# Altium PCB SL1 Xilinx Spartan-Component Clearance.PcbDoc
Units mm, origin at the board's own origin, x right, y up, seen from the top; angles counter-clockwise.
Board outline 180.01 x 50.51 mm, 2 copper layers (Top Layer, Bottom Layer), stack 1.646 mm thick; 115 components, 126 nets, 641 pads, 0 vias.
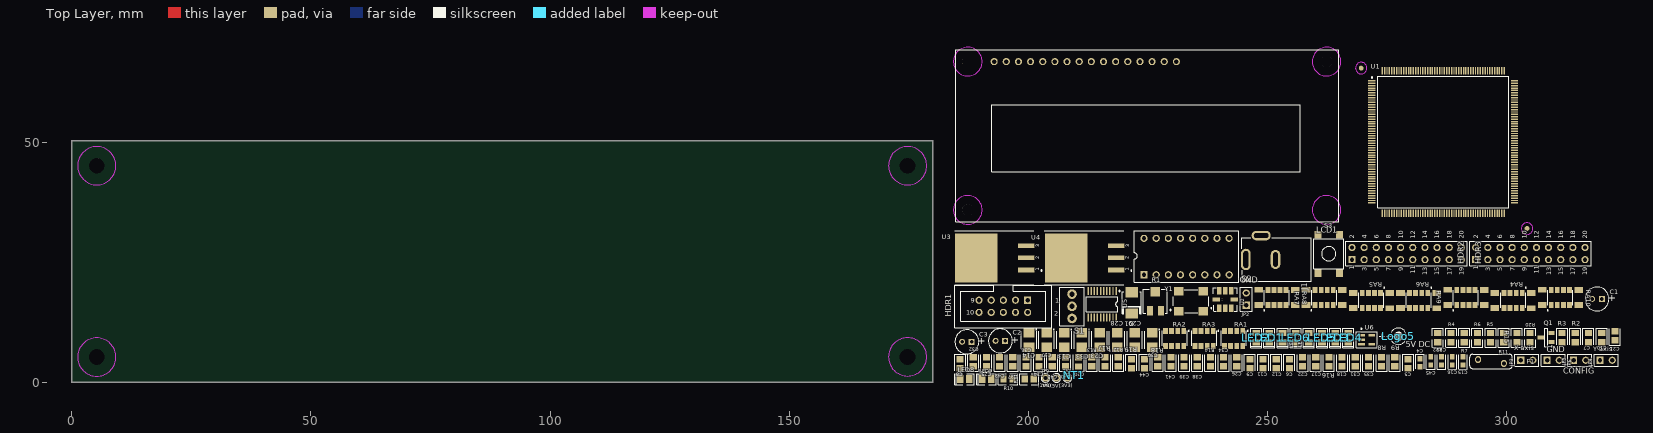
[diagram p0: Top Layer view]
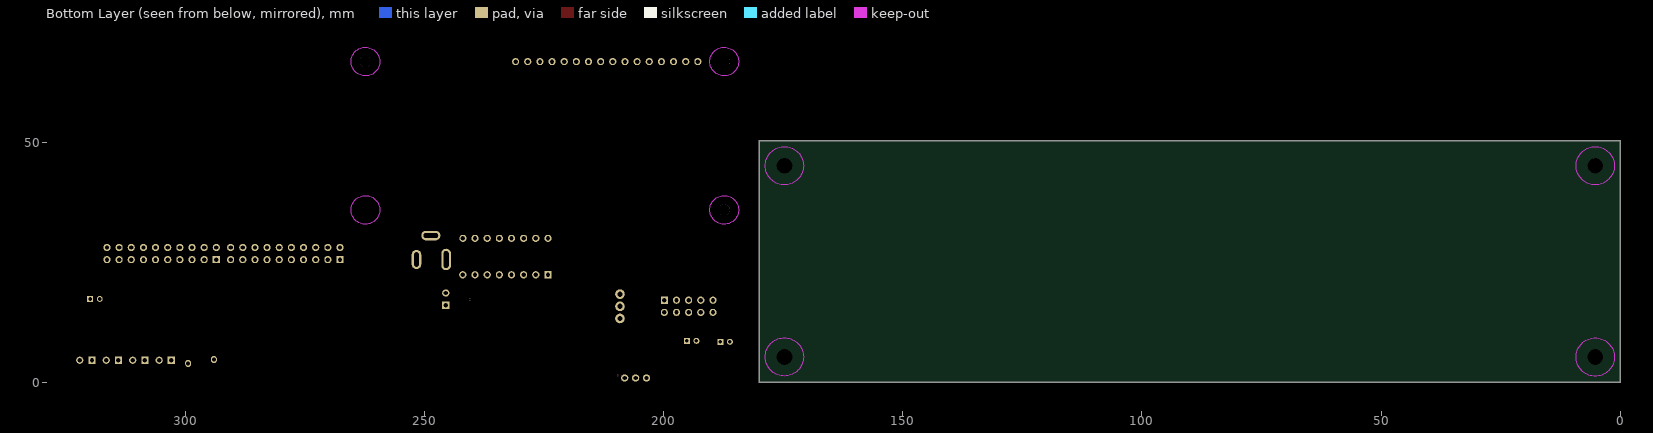
[diagram p1: Bottom Layer view, seen from below]

## Layer stack, top to bottom
Top Solder: solder mask 0.0102, Solder Resist, Dk 3.5
Top Layer: signal copper 0.0356
Dielectric1: core 1.5748, FR-4, Dk 4.8
Bottom Layer: signal copper 0.0356
Bottom Solder: solder mask 0.0102, Solder Resist, Dk 3.5

## Board outline
0,-0.005 cw(c0,0) -0.005,0 -0.005,50.5 cw(c0,50.5) 0,50.505 180,50.505 cw(c180,50.5) 180.005,50.5 180.005,0 cw(c180,0) 180,-0.005

## Design rules (kind name [scope] priority, off if disabled: settings)
Clearance "Clearance_Power Polygon" [inpolygon and innetclass('Power')] p1: gap=0.3 ignorepadtopadclearanceinfootprint=FALSE except(0: Arc-Hole Track-Hole SMDPad-Hole THPad-Hole Via-Hole Fill-Hole Poly-Hole Region-Hole Text-Hole)
Clearance [All] p2: gap=0.2 ignorepadtopadclearanceinfootprint=FALSE except(0: Arc-Hole Track-Hole SMDPad-Hole THPad-Hole Via-Hole Fill-Hole Poly-Hole Region-Hole Text-Hole) // General
ComponentClearance ComponentClearance_LCD1_U1 [Incomponent('LCD1') vs Incomponent('U1')] p1: gap=0.254 collisioncheckmode=3 verticalgap=0.254 showdistances=FALSE
ComponentClearance ComponentClearance_All [All] p2: gap=0.254 collisioncheckmode=3 verticalgap=0.254 showdistances=FALSE
FabricationTestPointUsage TestPointUsage [All] p1 off: valid=0 allowmultiple=FALSE
FabricationTestpoint Testpoint [All] p1 off: side=3 testpointundercomponent=TRUE minsize=1.016 maxsize=2.54 preferedsize=1.524 minholesize=0 maxholesize=1.016 preferedholesize=0.813 testpointgrid=0.025 allowsidetop=TRUE allowsidebottom=TRUE usegrid=TRUE gridtolerance=0
HoleSize [All] p1: absolutevalues=TRUE maxlimit=3.302 minlimit=0 maxpercent=80.000 minpercent=20.000
PlaneConnect [All] p1: planeconnectstyle=Relief reliefexpansion=0.3 reliefentries=4 reliefconductorwidth=0.2 reliefairgap=0.2
PolygonConnect PolygonConnect_Power [innetclass('Power')] p1: connectstyle=Relief reliefconductorwidth=0.3 reliefentries=4 polygonreliefangle="90 Angle" airgapwidth=0.254
PolygonConnect [All] p2: connectstyle=Relief reliefconductorwidth=0.2 reliefentries=4 polygonreliefangle="90 Angle" airgapwidth=0.254
RoutingVias RoutingVias_Power [innetclass('Power')] p1: holewidth=0.6 width=0.9 viastyle="Through Hole" minholewidth=0.6 minwidth=0.9 maxholewidth=0.8 maxwidth=1.5
RoutingVias [All] p2: holewidth=0.6 width=0.9 viastyle="Through Hole" minholewidth=0.6 minwidth=0.9 maxholewidth=0.6 maxwidth=0.9
SilkToSolderMaskClearance SilkscreenOverComponentPads [IsPad] p1: minsilkscreentomaskgap=0.254 clearancetoexposedcopper=TRUE
SolderMaskExpansion SolderMaskExpansion_Power_Vias [isvia] p1: expansion=0 istentingtop=FALSE
SolderMaskExpansion [All] p2: expansion=0.1 istentingtop=FALSE
Width Width_Power [innetclass('Power') and not inpolygon] p1: maxlimit=2 minlimit=0.3 preferedwidth=0.3
Width [All] p2: maxlimit=2 minlimit=0.2 preferedwidth=0.2
24 further rules are at their usual default settings.

## Classes and differential pairs
net class Power: 5V GND VCCINT VCCO
net class LCD_DB[7..0]: LCD_DB0 LCD_DB1 LCD_DB2 LCD_DB3 LCD_DB4 LCD_DB5 LCD_DB6 LCD_DB7
net class LEDS[7..0]: LEDS0 LEDS1 LEDS2 LEDS3 LEDS4 LEDS5 LEDS6 LEDS7
net class SW[7..0]: SW0 SW1 SW2 SW3 SW4 SW5 SW6 SW7
component class SL_FPGA_Manual_2E: C1 C2 C3 C5 C6 C7 C8 C9 C10 C11 C12 C13 C14 C17 C18 C20 C21 C22 C23 C24 C25 C26 C27 C28 C29 C30 C31 C32 C33 C34 C35 C36 C37 C38 C39 C40 C41 C42 C43 D1 F1 J1 JP2 JP6 LED9 R12 R13 R14 R15 R17 R18 R19 S1 TP1 TP2 TP3 U3 U4
component class U_SL_Config: C4 C44 LED8 R4 R5 R6 R20 U5 U6
component class U_SL_FPGA_Auto_2E: U1
component class U_SL_LCD_SW_LED: LCD1 LED0 LED1 LED2 LED3 LED4 LED5 LED6 LED7 Q1 R1 R2 R3 R8 R9 R16 RA1 RA2 RA3 RA4 RA5 RA6 RA7 RA8 RA9 RA10 S2 S3

## Components (designator, comment, footprint, x,y, rotation, side; value= is the part's Value field where it differs from the comment)
C1 "100uF 16V" CAPPR2-5X6.8 318.876,17.379 r180 top
C2 "100uF 16V" CAPPR2-5X6.8 194.14,8.623 r180 top
C3 "100uF 16V" CAPPR2-5X6.8 187.14,8.423 r180 top
C4 "10nF" CC1608-0603 281.856,4.057 r270 top
C5 "0.1uF" CC2012-0805 279.36,3.856 r270 top
C6 "0.1uF" CC2012-0805 254.574,3.856 r270 top
C7 "0.1uF" CC2012-0805 317.091,9.31 r270 top
C8 "0.1uF" CC2012-0805 185.724,3.856 r270 top
C9 "0.1uF" CC2012-0805 246.312,3.856 r270 top
C10 "0.1uF" CC2012-0805 319.845,9.31 r270 top
C11 "0.1uF" CC2012-0805 249.066,3.856 r270 top
C12 "0.1uF" CC2012-0805 251.82,3.856 r270 top
C13 "10uF" MCCT-B 207.485,8.8 r270 top
C14 "10uF" MCCT-B 200.127,8.8 r270 top
C15 "100nF" CC1608-0603 290.875,4.444 r90 top
C16 "100nF" CC1608-0603 288.621,4.444 r90 top
C17 "0.1uF" CC2012-0805 260.068,4.245 r90 top
C18 "0.1uF" CC2012-0805 265.576,4.245 r90 top
C19 "100nF" CC1608-0603 286.367,4.444 r90 top
C20 "0.1uF" CC2012-0805 210.496,4.245 r90 top
C21 "0.1uF" CC2012-0805 322.585,9.699 r90 top
C22 "0.1uF" CC2012-0805 257.314,4.245 r90 top
C23 "10uF" MCCT-B 214.865,8.809 r90 top
C24 "0.1uF" CC2012-0805 202.234,4.245 r90 top
C25 "0.1uF" CC2012-0805 191.218,4.245 r90 top
C26 "0.1uF" CC2012-0805 243.544,4.245 r90 top
C27 "10uF" MCCT-B 203.806,8.8 r270 top
C28 "10uF" MCCT-B 218.544,8.809 r90 top
C29 "10uF" MCCT-B 222.223,8.809 r90 top
C30 "10uF" MCCT-B 225.88,8.8 r270 top
C31 "0.1uF" CC2012-0805 268.33,4.245 r90 top
C32 "0.1uF" CC2012-0805 188.464,4.245 r90 top
C33 "10uF" MCCT-B 211.164,8.8 r270 top
C34 "0.1uF" CC2012-0805 240.79,4.245 r90 top
C35 "0.1uF" CC2012-0805 271.084,4.245 r90 top
C36 "0.1uF" CC2012-0805 199.48,4.245 r90 top
C37 "0.1uF" CC2012-0805 196.726,4.245 r90 top
C38 "0.1uF" CC2012-0805 235.282,4.245 r90 top
C39 "0.1uF" CC2012-0805 232.528,4.245 r90 top
C40 "0.1uF" CC2012-0805 207.742,4.245 r90 top
C41 "0.1uF" CC2012-0805 229.774,4.245 r90 top
C42 "0.1uF" CC2012-0805 204.988,4.245 r90 top
C43 "0.1uF" CC2012-0805 193.972,4.245 r90 top
C44 "0.1uF" CC2012-0805 224.28,3.856 r270 top
C45 "10nF" CC1608-0603 284.113,4.444 r90 top
D1 "SM6T6V8A" DO214 221.605,16.599 r270 top
F1 "Polyswitch, 1.1A" RUE160_0.2 296.704,4.323 r0 top
HDR1 "Header 5X2" HDR2X5_LP 199.84,17.123 r0 top
HDR2 "Header 10X2" HDR2X10 293.513,25.601 r0 top
HDR3 "Header 10X2" HDR2X10 267.659,25.601 r0 top
J1 "KLD-0202-B" KLD-0202 259.151,25.641 r180 top
JP2 "GND" HDR1X2 245.535,16.09 r90 top
JP3 "X axis" HDR1X2 302.917,4.573 r0 top
JP4 "Y axis" HDR1X2 319.519,4.573 r0 top
JP5 "CONFIG" HDR1X2 313.985,4.573 r0 top
JP6 "GND" HDR1X2 308.451,4.573 r0 top
LCD1 "162A" 162A 192.837,67.005 r0 top
LED0 "HSMH-C170" "SMD _LED" 253.128,9.307 r90 top
LED1 "HSMH-C170" "SMD _LED" 250.374,9.307 r90 top
LED2 "HSMH-C170" "SMD _LED" 247.62,9.307 r90 top
LED3 "HSMH-C170" "SMD _LED" 264.144,9.307 r90 top
LED4 "HSMH-C170" "SMD _LED" 266.898,9.307 r90 top
LED5 "HSMH-C170" "SMD _LED" 261.39,9.307 r90 top
LED6 "HSMH-C170" "SMD _LED" 255.882,9.307 r90 top
LED7 "HSMH-C170" "SMD _LED" 258.636,9.307 r90 top
LED8 "HSMH-C170" "SMD _LED" 186.7,0.641 r0 top
LED9 "HSMH-C170" "SMD _LED" 191.284,0.641 r0 top
Logo5 "5V" "5V SYMBOL" 277.357,9.598 r0 top
NT1 "GND" NT 209.599,1.706 r270 top net-tie
Q1 "2N7002" SO-G3 308.215,9.343 r90 top
R1 "20K" POT4MM-2 226.547,16.897 r90 top
R2 "560R" CC2012-0805 314.337,9.31 r270 top
R3 "10K" CC2012-0805 311.583,9.31 r270 top
R4 "4K7" CR2012-0805 288.344,9.309 r270 top
R5 "4K7" CR2012-0805 296.606,9.309 r270 top
R6 "4K7" CR2012-0805 293.852,9.309 r270 top
R7 "1K" CR2012-0805 291.098,9.309 r270 top
R8 "68R" CC2012-0805 273.838,4.245 r90 top
R9 "68R" CC2012-0805 276.592,4.245 r90 top
R10 "680R" CR2012-0805 195.74,0.647 r180 top
R11 "0R" CR2012-0805 299.36,9.3 r90 top
R12 "100R" CC2012-0805 218.758,4.245 r90 top
R13 "120R" CC2012-0805 213.25,4.245 r90 top
R14 "100R" CC2012-0805 238.036,4.245 r90 top
R15 "270R" CR2012-0805 302.114,9.3 r90 top
R16 "4K7" CC2012-0805 262.822,4.245 r90 top
R17 "47R" CC2012-0805 216.004,4.245 r90 top
R18 "120R" CC2012-0805 227.02,4.245 r90 top
R19 "5R6" CC2012-0805 221.526,3.856 r270 top
R20 "270R" CR2012-0805 304.868,9.3 r90 top
R21 "100R" CR2012-0805 200.185,0.646 r0 top
R22 "100R" CR2012-0805 285.59,9.3 r90 top
RA1 "270R" MNR34 242.919,9.127 r270 top
RA2 "270R" MNR34 230.581,9.127 r270 top
RA3 "270R" MNR34 236.75,9.127 r270 top
RA4 "4K7" MNR34T 301.341,17.067 r90 top
RA5 "4K7" MNR34T 271.719,17.067 r90 top
RA6 "4K7" MNR34T 281.593,17.067 r90 top
RA7 "4K7" MNR34T 261.827,17.688 r270 top
RA8 "4K7" MNR34T 251.953,17.688 r270 top
RA9 "270R" MNR34T 291.449,17.688 r270 top
RA10 "270R" MNR34T 311.197,17.688 r270 top
S1 "TL36WW050" PCB_SWITCH 209.123,13.297 r90 top
S2 "A6ER-8104" DIP-16-KEY 224.187,22.441 r0 top
S3 "DTSM-61-NR" B3FS_SWITCH 262.768,26.831 r270 top
TP1 "(5V)" TP 205.846,0.868 r0 top
TP2 "(3V3)" TP 208.135,0.868 r0 top
TP3 "(1V8)" TP 203.557,0.868 r0 top
U1 "XC2S300E-6PQ208C" PQ208 286.719,50.238 r0 top
U2 "ADXL202E" E-8 241.141,17.277 r90 top
U3 "LM1084IS-ADJ" TO-263 199.576,23.448 r90 top
U4 "LM1084IS-ADJ" TO-263 218.355,23.448 r90 top
U5 "XCF02SVO20C" VO20 215.408,16.286 r180 top
U6 "SN74LVC1G04DBV" SO-G5/P.95 270.691,8.85 r270 top
Y1 "25MHz" QSMO_4200 231.474,14.398 r0 top

## Footprints (in the part's own frame and the unit in brackets; to place one, negate y for a bottom-side part, rotate by r counter-clockwise, add the part's x,y. Pads: shape width x height; smd on the part's side, far side on the other; paste and mask are expansions set on the pad)
"5V SYMBOL" [mm]
  silkscreen extent -4.01,-1.71 1.7,1.71
162A [mm]
  round 1.5 hole 0.9: 1(0,0) 2(2.54,0) 3(5.08,0) 4(7.62,0) 5(10.16,0) 6(12.7,0) 7(15.24,0) 8(17.78,0) 9(20.32,0) 10(22.86,0) 11(25.4,0) 12(27.94,0) 13(30.48,0) 14(33.02,0) 15(35.56,0) 16(38.1,0)
  round 2.3 hole 2.5 unplated: M1(-5.5,0) M2(69.5,0) M3(-5.5,-31) M4(69.5,-31)
  Keep-Out Layer circle w0.2: c-5.5,0 r3
  Keep-Out Layer circle w0.2: c-5.5,-31 r3
  Keep-Out Layer circle w0.2: c69.5,-31 r3
  Keep-Out Layer circle w0.2: c69.5,0 r3
  silkscreen extent -8,-33.5 72,2.5, body extent -8.01,-33.5 72,2.5, height 10.16
B3FS_SWITCH [mm]
  rect 1.6x1.4 smd: 1(3.998,-2.244) 2(-4.012,-2.244) 3(3.998,2.246) 4(-4.012,2.246)
  silkscreen extent -3.17,-3.15 3.14,3.16, body extent -4.57,-3.15 4.57,3.16, height 4.57
CAPPR2-5X6.8 [mm]
  rect 1.25x1.25 hole 0.75: 1(-0.994,-0.009)
  round 1.25 hole 0.75: 2(1.006,-0.009)
  silkscreen extent -2.49,-2.51 2.5,2.49, body extent -2.49,-2.51 2.51,2.49, height 10.16
CC1608-0603 [mm]
  rect 1.1x1 smd: 1(-0.843,0.001) 2(0.857,0.001)
  silkscreen extent -1.79,-0.9 1.31,0.9, body extent -1.46,-0.57 1.46,0.57, height 0.76
CC2012-0805 [mm]
  rect 1.3x1.5 smd: 1(-0.945,-0.007) 2(0.955,-0.007)
  silkscreen extent -1.99,-1.16 1.51,1.14, body extent -1.52,-0.7 1.52,0.7, height 0.76
CR2012-0805 [mm]
  rect 1.3x1.5 smd: 1(-0.946,0) 2(0.954,0)
  silkscreen extent -2,-1.15 2,1.15, body extent -1.52,-0.7 1.52,0.7, height 0.76
DIP-16-KEY [mm]
  rect 1.5x1.5 hole 0.9: 1(-0.011,0.001)
  round 1.5 hole 0.9: 2(2.529,0.001) 3(5.069,0.001) 4(7.609,0.001) 5(10.149,0.001) 6(12.689,0.001) 7(15.229,0.001) 8(17.789,0.001) 9(17.769,7.621) 10(15.229,7.621) 11(12.689,7.621) 12(10.149,7.621) 13(7.609,7.621) 14(5.069,7.621) 15(2.529,7.621) 16(-0.011,7.621)
  silkscreen extent -2.06,-1.59 19.82,9.2, body extent -2.03,-1.52 19.81,9.14, height 7.11
DO214 [mm]
  rect 2.159x2.7 smd: 1(-2.21,0.005) 2(2.235,0.005)
  silkscreen extent -2.27,-1.96 2.3,1.97, body extent -3.18,-1.27 3.18,1.27, height 1.27
E-8 [mil]
  round 15 hole 20 unplated: 0(-0.02,23.98)
  rect 60x35 smd: 1(-72.85,49.98) 2(-72.85,-0.02) 3(-72.85,-50.02) 5(72.82,-50.02) 6(72.82,-0.02) 7(72.82,49.98)
  rect 35x60 smd: 4(-0.02,-74.82) 8(-0.02,74.79)
  silkscreen extent -98,-98 99,118, body extent -95,-95 95,95, height 80
HDR1X2 [mm]
  rect 1.5x1.5 hole 0.9: 1(-0.011,0.007)
  round 1.5 hole 0.9: 2(2.529,0.007)
  silkscreen extent -1.28,-1.26 3.8,1.28, body extent -1.27,-1.27 3.81,1.27, height 10
HDR2X5_LP [mm]
  rect 1.5x1.5 hole 0.9: 1(0.003,0.004)
  round 1.5 hole 0.9: 2(0.003,-2.536) 3(-2.537,0.004) 4(-2.537,-2.536) 5(-5.077,0.004) 6(-5.077,-2.536) 7(-7.617,0.004) 8(-7.617,-2.536) 9(-10.157,0.004) 10(-10.157,-2.536)
  silkscreen extent -15.24,-5.71 5.08,3.18, body extent -15.24,-5.71 5.08,3.18, height 10
HDR2X10 [mm]
  rect 1.5x1.5 hole 0.9: 1(-0.011,0.007)
  round 1.5 hole 0.9: 2(-0.011,2.547) 3(2.529,0.007) 4(2.529,2.547) 5(5.069,0.007) 6(5.069,2.547) 7(7.609,0.007) 8(7.609,2.547) 9(10.149,0.007) 10(10.149,2.547) 11(12.689,0.007) 12(12.689,2.547) 13(15.229,0.007) 14(15.229,2.547) 15(17.769,0.007) 16(17.769,2.547) 17(20.309,0.007) 18(20.309,2.547) 19(22.849,0.007) 20(22.849,2.547)
  silkscreen extent -1.28,-1.26 24.12,3.82, body extent -1.27,-1.27 24.13,3.81, height 10
KLD-0202 [mm]
  oval 2x4.5 hole 1 slot 3.5 at 90 deg: 1(13.692,-0.001)
  oval 2x4 hole 1 slot 3 at 90 deg: 2(7.492,-0.001)
  oval 4x2 hole 1 slot 3 at 0 deg: 3(10.492,-5.001)
  silkscreen extent -0.01,-4.5 14.59,4.5, body extent 0,-4.44 14.6,4.45, height 7.62
MCCT-B [mm]
  rect 2x2.2 smd: 1(-1.505,-0.002) 2(1.495,-0.002)
  silkscreen extent -2.3,-1.6 1.8,1.6, body extent -2.29,-0.89 2.29,0.89, height 1.27
MNR34 [mm]
  rect 1.2x1 smd: 1(-1.578,1.898) 2(-1.578,0.628) 3(-1.578,-0.642) 4(-1.578,-1.912) 5(1.572,-1.912) 6(1.572,-0.642) 7(1.572,0.628) 8(1.572,1.898)
  silkscreen extent -1.68,-2.62 1.55,3.06, body extent -2.03,-2.29 2.03,2.29, height 1.27
MNR34T [mm]
  rect 1.2x1 smd: 1(1.575,-1.896) 2(1.575,-0.626) 3(1.575,0.644) 4(1.575,1.914) 5(-1.575,1.914) 6(-1.575,0.644) 7(-1.575,-0.626) 8(-1.575,-1.896)
  rect 1.2x1.8 smd: STP(-1.6,-3.801) STP(-1.575,3.819) STP(1.575,3.819) STP(1.575,-3.801)
  silkscreen extent -1.55,-2.76 2.79,2.62, body extent -1.65,-2.71 1.68,2.72, height 2
NT [mm]
  rect 0.2x0.2 smd: 1(0.01,0.011) 2(0.51,0.011)
  Top Layer lines w0.3: 0.51,0.011 0.01,0.011
PCB_SWITCH [mm]
  round 2 hole 1.1: 1(0.011,0.005) 2(2.551,0.005) 3(5.091,0.005)
  silkscreen extent -1.54,-2.53 6.59,2.55, body extent -1.52,-2.54 6.6,2.54, height 15
POT4MM-2 [mm]
  rect 2x1.3 smd: CCW(-2.008,-1.162) CW(-2.008,1.138)
  rect 2x2 smd: W(1.992,-0.012)
  silkscreen extent -2.51,-2.51 2.49,2.49, body extent -2.92,-2.41 2.92,2.41, height 3.05
PQ208 [mm]
  rect 1.55x0.3 smd: 1(-14.902,12.738) 2(-14.902,12.238) 3(-14.902,11.738) 4(-14.902,11.238) 5(-14.902,10.738) 6(-14.902,10.238) 7(-14.902,9.738) 8(-14.902,9.238) 9(-14.902,8.738) 10(-14.902,8.238) 11(-14.902,7.738) 12(-14.902,7.238) 13(-14.902,6.738) 14(-14.902,6.238) 15(-14.902,5.738) 16(-14.902,5.238) 17(-14.902,4.738) 18(-14.902,4.238) 19(-14.902,3.738) 20(-14.902,3.238) 21(-14.902,2.738) 22(-14.902,2.238) 23(-14.902,1.738) 24(-14.902,1.238) 25(-14.902,0.738) 26(-14.902,0.238) 27(-14.902,-0.262) 28(-14.902,-0.762) 29(-14.902,-1.262) 30(-14.902,-1.762) 31(-14.902,-2.262) 32(-14.902,-2.762) 33(-14.902,-3.262) 34(-14.902,-3.762) 35(-14.902,-4.262) 36(-14.902,-4.762) 37(-14.902,-5.262) 38(-14.902,-5.762) 39(-14.902,-6.262) 40(-14.902,-6.762) 41(-14.902,-7.262) 42(-14.902,-7.762) 43(-14.902,-8.262) 44(-14.902,-8.762) 45(-14.902,-9.262) 46(-14.902,-9.762) 47(-14.902,-10.262) 48(-14.902,-10.762) 49(-14.902,-11.262) 50(-14.902,-11.762) 51(-14.902,-12.262) 52(-14.902,-12.762) 105(14.898,-12.762) 106(14.898,-12.262) 107(14.898,-11.762) 108(14.898,-11.262) 109(14.898,-10.762) 110(14.898,-10.262) 111(14.898,-9.762) 112(14.898,-9.262) 113(14.898,-8.762) 114(14.898,-8.262) 115(14.898,-7.762) 116(14.898,-7.262) 117(14.898,-6.762) 118(14.898,-6.262) 119(14.898,-5.762) 120(14.898,-5.262) 121(14.898,-4.762) 122(14.898,-4.262) 123(14.898,-3.762) 124(14.898,-3.262) 125(14.898,-2.762) 126(14.898,-2.262) 127(14.898,-1.762) 128(14.898,-1.262) 129(14.898,-0.762) 130(14.898,-0.262) 131(14.898,0.238) 132(14.898,0.738) 133(14.898,1.238) 134(14.898,1.738) 135(14.898,2.238) 136(14.898,2.738) 137(14.898,3.238) 138(14.898,3.738) 139(14.898,4.238) 140(14.898,4.738) 141(14.898,5.238) 142(14.898,5.738) 143(14.898,6.238) 144(14.898,6.738) 145(14.898,7.238) 146(14.898,7.738) 147(14.898,8.238) 148(14.898,8.738) 149(14.898,9.238) 150(14.898,9.738) 151(14.898,10.238) 152(14.898,10.738) 153(14.898,11.238) 154(14.898,11.738) 155(14.898,12.238) 156(14.898,12.738)
  rect 0.3x1.55 smd: 53(-12.752,-14.912) 54(-12.252,-14.912) 55(-11.752,-14.912) 56(-11.252,-14.912) 57(-10.752,-14.912) 58(-10.252,-14.912) 59(-9.752,-14.912) 60(-9.252,-14.912) 61(-8.752,-14.912) 62(-8.252,-14.912) 63(-7.752,-14.912) 64(-7.252,-14.912) 65(-6.752,-14.912) 66(-6.252,-14.912) 67(-5.752,-14.912) 68(-5.252,-14.912) 69(-4.752,-14.912) 70(-4.252,-14.912) 71(-3.752,-14.912) 72(-3.252,-14.912) 73(-2.752,-14.912) 74(-2.252,-14.912) 75(-1.752,-14.912) 76(-1.252,-14.912) 77(-0.752,-14.912) 78(-0.252,-14.912) 79(0.248,-14.912) 80(0.748,-14.912) 81(1.248,-14.912) 82(1.748,-14.912) 83(2.248,-14.912) 84(2.748,-14.912) 85(3.248,-14.912) 86(3.748,-14.912) 87(4.248,-14.912) 88(4.748,-14.912) 89(5.248,-14.912) 90(5.748,-14.912) 91(6.248,-14.912) 92(6.748,-14.912) 93(7.248,-14.912) 94(7.748,-14.912) 95(8.248,-14.912) 96(8.748,-14.912) 97(9.248,-14.912) 98(9.748,-14.912) 99(10.248,-14.912) 100(10.748,-14.912) 101(11.248,-14.912) 102(11.748,-14.912) 103(12.248,-14.912) 104(12.748,-14.912) 157(12.748,14.888) 158(12.248,14.888) 159(11.748,14.888) 160(11.248,14.888) 161(10.748,14.888) 162(10.248,14.888) 163(9.748,14.888) 164(9.248,14.888) 165(8.748,14.888) 166(8.248,14.888) 167(7.748,14.888) 168(7.248,14.888) 169(6.748,14.888) 170(6.248,14.888) 171(5.748,14.888) 172(5.248,14.888) 173(4.748,14.888) 174(4.248,14.888) 175(3.748,14.888) 176(3.248,14.888) 177(2.748,14.888) 178(2.248,14.888) 179(1.748,14.888) 180(1.248,14.888) 181(0.748,14.888) 182(0.248,14.888) 183(-0.252,14.888) 184(-0.752,14.888) 185(-1.252,14.888) 186(-1.752,14.888) 187(-2.252,14.888) 188(-2.752,14.888) 189(-3.252,14.888) 190(-3.752,14.888) 191(-4.252,14.888) 192(-4.752,14.888) 193(-5.252,14.888) 194(-5.752,14.888) 195(-6.252,14.888) 196(-6.752,14.888) 197(-7.252,14.888) 198(-7.752,14.888) 199(-8.252,14.888) 200(-8.752,14.888) 201(-9.252,14.888) 202(-9.752,14.888) 203(-10.252,14.888) 204(-10.752,14.888) 205(-11.252,14.888) 206(-11.752,14.888) 207(-12.252,14.888) 208(-12.752,14.888)
  round 1 smd: FID1(-17.152,15.413) FID2(17.523,-18.112)
  Top Layer keep-out circle w0.2: c-17.152,15.413 r1.2
  Top Layer keep-out circle w0.2: c17.523,-18.137 r1.2
  silkscreen extent -15.03,-13.74 13.72,13.71, body extent -15.35,-15.36 15.35,15.34, height 2.5
QSMO_4200 [mm]
  rect 2x1.8 smd: 1(-0.009,0.39) 2(5.071,0.39) 3(5.071,4.59) 4(-0.009,4.59)
  silkscreen extent -1.91,0.09 6.21,4.94, body extent -1.14,-0.32 6.1,5.3, height 1.5
RUE160_0.2 [mm]
  oval 1.2x1.5 hole 0.8: 1(-2.7,0.4) 2(2.7,-0.4)
  silkscreen extent -4.45,-1.5 4.45,1.5, body extent -4.45,-1.5 4.45,1.5, height 12
"SMD _LED" [mm]
  rect 1.3x1.6 smd: 1(0.948,0.006) 2(-0.952,0.006)
  silkscreen extent -2.13,-1.14 2,1.16, body extent -1.52,-0.64 1.52,0.64, height 1.27
SO-G3 [mm]
  rect 0.85x1.3 smd: 1(-0.939,-1.107) 2(0.961,-1.107) 3(0.011,1.093)
  silkscreen extent -1.94,-1.33 1.96,0.29, body extent -1.65,-1.52 1.65,1.51, height 2.54
SO-G5/P.95 [mm]
  rect 0.55x1.45 smd: 1(-0.954,-1.07) 2(-0.004,-1.07) 3(0.946,-1.07) 4(0.946,1.08) 5(-0.954,1.08)
  silkscreen extent -2.43,-2.19 1.65,2.21, body extent -1.27,-1.78 1.27,1.78, height 0.89
TO-263 [mm]
  rect 1x3.4 smd: 1(-0.006,0.009) 2(2.534,0.009) 3(5.074,0.009)
  rect 10.25x8.9 smd: 4(2.534,10.459)
  silkscreen extent -3.11,-3.29 8.19,15.01, body extent -2.29,-1.14 7.37,14.35, height 2.03
TP [mil]
  round 60 hole 35.43: 1(0.14,0.45)
  silkscreen extent -36,-36 36,36, body extent -36,-36 36,36
VO20 [mm]
  rect 0.3x1.65 smd: 1(-2.929,-2.778) 2(-2.279,-2.778) 3(-1.629,-2.778) 4(-0.979,-2.778) 5(-0.329,-2.778) 6(0.321,-2.778) 7(0.971,-2.778) 8(1.621,-2.778) 9(2.271,-2.778) 10(2.921,-2.778) 11(2.921,2.772) 12(2.271,2.772) 13(1.621,2.772) 14(0.971,2.772) 15(0.321,2.772) 16(-0.329,2.772) 17(-0.979,2.772) 18(-1.629,2.772) 19(-2.279,2.772) 20(-2.929,2.772)
  silkscreen extent -3.75,-2.9 3.3,1.55, body extent -3.3,-3.56 3.3,3.55, height 1.52

## Part data
C1 C2 C3 C13 C14 C23 C27 C28 C29 C30 C33: library part CAP_POLAR, "Polar Capacitor"
C4 C5 C6 C7 C8 C9 C10 C11 C12 C15 C16 C17 C18 C19 C20 C21 C22 C24 C25 C26 C31 C32 C34 C35 C36 C37 C38 C39 C40 C41 C42 C43 C44 C45: library part CAP, "Capacitor"
D1: library part BZG03C13, "Zener Diode, 6.2V, 5W"
F1: library part "Fuse 2", "Polyswitch 1.1A, Raychem RUE110"
HDR1: "Header, 5-Pin, Dual row"
HDR2 HDR3: "Header, 10-Pin, Dual row"
J1: "Low Voltage Power Supply Connector"
JP2 JP3 JP4 JP5 JP6 NT1: library part "Jumper, 2-Pin", "Jumper, 2-Pin"
LCD1: "16 char * 2 line LCD character display with b/light"
LED0 LED1 LED2 LED3 LED4 LED5 LED6 LED7 LED8 LED9: library part HSMX-C670, "Typical RED GaAs SMD LED Agilent make"
Q1: "N Channel Mosfet"
R1: library part "RPot SM", "Square Trimming Potentiometer"
R2 R3 R4 R5 R6 R7 R8 R9 R11 R12 R13 R14 R15 R16 R17 R18 R19 R20: library part RES, "Resistor"
R10 R21 R22: library part Res1, "Resistor"
RA1 RA2 RA3 RA4 RA5 RA6 RA7 RA8 RA9 RA10: library part MNR34, "3216x4 Resistor Array"
S1: library part PCB_MOUNT_SWITCH, "SPDT Subminiature Toggle Switch"
S2: "DIP Switch Side actuator long liver Piano Key"
S3: library part B3FS, "SPNA SMD Keyboard Switch"
TP1 TP2 TP3: library part TestPin
U1: "Spartan-IIE 1.8V FPGA, 208-Pin PQFP, Standard Performance, Commercial Grade"
U2: "Accelerometer with Digital Output"
U3 U4: "5A Low Dropout Possitive Regulators"
U5: "XCF00S Series, Platform Flash In-System Programmable Configuration 3.3V PROM, 20-Pin TSOP, 2-Megabit, Commercial Grade"
U6: library part SN74AHC1G04DBVR
Y1: library part QSMO_4200, "Surface Mount Crystal Oscillator"

## Free pads (board coordinates)
  round 3 hole 3.3 unplated: M3(5.25,5.25) M3(5.25,45.25) M3(174.75,45.25) M3(174.75,5.275)

## Nets (pads, with @x,y where several pads share a name; then routed paths per layer and width w, separated by ;. In a path a pad name is that pad's centre, name@x,y a point inside that pad or via, vN(x,y) a via of type N, cw(c..) or ccw(c..) an arc to the next point about the centre after c; other vN are vias at no path point)
5V: C1.1 C13.1 C27.1 LCD1.2 LCD1.15 R1.CW R15.2 RA4.1 RA4.2 RA4.3 RA4.4 RA5.1 RA5.2 RA5.3 RA5.4 RA6.1 RA6.2 RA6.3 RA6.4 S1.1 S1.2 TP1.1 U3.3 U4.3
CCLK: U1.155 U5.3
CLK_BRD: NT1.2 U1.80 Y1.3
CLK_BRD_1: NT1.1 U1.77
DIN: U1.153 U5.1
DONE: R4.2 U1.104 U5.10 U6.2
GND: C1.2 C2.2 C3.2 C4.2 C5.1 C6.2 C7.2 C8.2 C9.2 C10.2 C11.2 C12.2 C13.2 C14.2 C15.2 C16.2 C17.1 C18.1 C19.2 C20.2 C21.2 C22.1 C23.2 C24.1 C25.2 C26.2 C27.2 C28.2 C29.2 C30.2 C31.2 C32.2 C33.2 C34.1 C35.2 C36.1 C37.2 C38.2 C39.2 C40.2 C41.2 C42.2 C43.2 C44.1 C45.2 D1.1 HDR1.9 HDR1.10 HDR2.20 HDR3.20 J1.2 J1.3 JP2.1 JP2.2 JP6.1 JP6.2 LCD1.1 LED9.2 Q1.2 R1.CCW R3.1 R7.1 R10.1 R14.1 R19.2 RA9.1 RA9.2 RA9.3 RA9.4 RA10.1 RA10.2 RA10.3 RA10.4 S2.1 S2.2 S2.3 S2.4 S2.5 S2.6 S2.7 S2.8 S3.3 S3.4 U1.1 U1.12 U1.19 U1.25 U1.32 U1.39 U1.50 U1.51 U1.54 U1.65 U1.72 U1.79 U1.85 U1.92 U1.103 U1.117 U1.124 U1.131 U1.137 U1.144 U1.158 U1.170 U1.177 U1.182 U1.183 U1.185 U1.190 U1.197 U2.3 U5.11 U6.3 Y1.2
HA2: HDR2.2 U1.191
HA3: HDR2.3 JP3.2 U1.189
HA4: HDR2.4 U1.188
HA5: HDR2.5 JP4.2 U1.187
HA6: HDR2.6 U1.181
HA7: HDR2.7 U1.179
HA8: HDR2.8 U1.180
HA9: HDR2.9 U1.176
HA10: HDR2.10 U1.178
HA11: HDR2.11 U1.174
HA12: HDR2.12 U1.175
HA13: HDR2.13 U1.169
HA14: HDR2.14 U1.173
HA15: HDR2.15 U1.167
HA16: HDR2.16 U1.168
HA17: HDR2.17 U1.165
HA18: HDR2.18 U1.166
HA19: HDR2.19 U1.164
HARD_TCK: HDR1.3 U1.207 U5.6
HARD_TDI: HDR1.1 U1.159
HARD_TDO: HDR1.2 U5.17
HARD_TMS: HDR1.4 U1.2 U5.5
HB2: HDR3.2 U1.163
HB3: HDR3.3 U1.160
HB4: HDR3.4 U1.162
HB5: HDR3.5 U1.138
HB6: HDR3.6 U1.161
HB7: HDR3.7 U1.135
HB8: HDR3.8 U1.136
HB9: HDR3.9 U1.133
HB10: HDR3.10 U1.134
HB11: HDR3.11 U1.129
HB12: HDR3.12 U1.132
HB13: HDR3.13 U1.126
HB14: HDR3.14 U1.127
HB15: HDR3.15 U1.123
HB16: HDR3.16 U1.125
HB17: HDR3.17 U1.121
HB18: HDR3.18 U1.122
HB19: HDR3.19 U1.120
I\N\I\T\: R5.2 U1.107 U5.8
JTAG_NEXUS_TCK: HDR1.7 U1.6
JTAG_NEXUS_TDI: HDR1.5 U1.4
JTAG_NEXUS_TDO: HDR1.6 U1.5
JTAG_NEXUS_TMS: HDR1.8 U1.7
LCD_CONTRAST: LCD1.3 R1.W
LCD_DB0: RA2.5 U1.20
LCD_DB1: RA2.6 U1.18
LCD_DB2: RA2.7 U1.17
LCD_DB3: RA2.8 U1.16
LCD_DB4: RA3.5 U1.15
LCD_DB5: RA3.6 U1.11
LCD_DB6: RA3.7 U1.10
LCD_DB7: RA3.8 U1.9
LCD_DB#0: LCD1.7 RA2.4 RA5.5
LCD_DB#1: LCD1.8 RA2.3 RA5.6
LCD_DB#2: LCD1.9 RA2.2 RA5.7
LCD_DB#3: LCD1.10 RA2.1 RA5.8
LCD_DB#4: LCD1.11 RA3.4 RA6.5
LCD_DB#5: LCD1.12 RA3.3 RA6.6
LCD_DB#6: LCD1.13 RA3.2 RA6.7
LCD_DB#7: LCD1.14 RA3.1 RA6.8
LCD_E: RA1.8 U1.21
LCD_E#: LCD1.6 RA1.1 RA4.8
LCD_LIGHT: R2.1 U1.8
LCD_RS: RA1.6 U1.23
LCD_RS#: LCD1.4 RA1.3 RA4.6
LCD_RW: RA1.7 U1.22
LCD_RW#: LCD1.5 RA1.2 RA4.7
LEDS0: LED0.1 U1.102
LEDS1: LED1.1 U1.101
LEDS2: LED2.1 U1.100
LEDS3: LED3.1 U1.99
LEDS4: LED4.1 U1.98
LEDS5: LED5.1 U1.97
LEDS6: LED6.1 U1.96
LEDS7: LED7.1 U1.95
M0: JP5.1 R7.2 U1.52
NetC15_1: C15.1 R11.2 U2.8
NetC16_1: C16.1 U2.6
NetC19_1: C19.1 U2.7
NetD1_2: D1.2 F1.2 S1.3
NetLCD1_16: LCD1.16 R8.1 R9.1
NetLED0_2: LED0.2 RA10.5
NetLED1_2: LED1.2 RA10.6
NetLED2_2: LED2.2 RA10.7
NetLED3_2: LED3.2 RA10.8
NetLED4_2: LED4.2 RA9.5
NetLED5_2: LED5.2 RA9.6
NetLED6_2: LED6.2 RA9.7
NetLED7_2: LED7.2 RA9.8
NetLED8_1: LED8.1 R20.1
NetLED8_2: LED8.2 U6.4
NetLED9_1: LED9.1 R15.1
NetQ1_1: Q1.1 R2.2 R3.2
NetQ1_3: Q1.3 R8.2 R9.2
NetR10_2: R10.2 U2.2
NetR12_1: R12.1 R13.2 U3.1
NetR12_2: R12.2 R14.2
NetR17_1: R17.1 R18.2 U4.1
NetR17_2: R17.2 R19.1
PROG_B: R6.2 U1.106 U5.7
PWR_IN: F1.1 J1.1
SW0: RA7.1 S2.16 U1.108
SW1: RA7.2 S2.15 U1.109
SW2: RA7.3 S2.14 U1.110
SW3: RA7.4 S2.13 U1.111
SW4: RA8.1 S2.12 U1.112
SW5: RA8.2 S2.11 U1.113
SW6: RA8.3 S2.10 U1.114
SW7: RA8.4 S2.9 U1.115
TDI_C: U1.157 U5.4
TEST: R16.2 S3.1 S3.2 U1.27
VCCINT: C3.1 C7.1 C8.1 C10.1 C20.1 C21.1 C25.1 C26.1 C28.1 C29.1 C30.1 C32.1 C34.2 C38.1 C39.1 C41.1 R18.1 TP3.1 U1.14 U1.28 U1.37 U1.67 U1.76 U1.90 U1.119 U1.128 U1.142 U1.172 U1.186 U1.195 U4.2
VCCO: C2.1 C4.1 C5.2 C6.1 C9.1 C11.1 C12.1 C14.1 C17.2 C18.2 C22.2 C23.1 C24.2 C31.1 C33.1 C35.1 C36.2 C37.1 C40.1 C42.1 C43.1 C44.2 C45.1 JP5.2 R4.1 R5.1 R6.1 R11.1 R13.1 R16.1 R20.2 RA7.5 RA7.6 RA7.7 RA7.8 RA8.5 RA8.6 RA8.7 RA8.8 TP2.1 U1.13 U1.26 U1.38 U1.53 U1.66 U1.78 U1.91 U1.105 U1.118 U1.130 U1.143 U1.156 U1.171 U1.184 U1.196 U1.208 U3.2 U5.18 U5.19 U5.20 U6.5 Y1.1 Y1.4
XOUT: R22.2 U2.5
XOUT_ALT: JP3.1 R22.1 U1.30
YOUT: R21.2 U2.4
YOUT_ALT: JP4.1 R21.1 U1.31
pads on no net: HDR2.1 HDR3.1 LCD1.M1 LCD1.M2 LCD1.M3 LCD1.M4 RA1.4 RA1.5 RA4.5 RA4.STP RA5.STP RA6.STP RA7.STP RA8.STP RA9.STP RA10.STP U1.3 U1.24 U1.29 U1.33 U1.34 U1.35 U1.36 U1.40 U1.41 U1.42 U1.43 U1.44 U1.45 U1.46 U1.47 U1.48 U1.49 U1.55 U1.56 U1.57 U1.58 U1.59 U1.60 U1.61 U1.62 U1.63 U1.64 U1.68 U1.69 U1.70 U1.71 U1.73 U1.74 U1.75 U1.81 U1.82 U1.83 U1.84 U1.86 U1.87 U1.88 U1.89 U1.93 U1.94 U1.116 U1.139 U1.140 U1.141 U1.145 U1.146 U1.147 U1.148 U1.149 U1.150 U1.151 U1.152 U1.154 U1.192 U1.193 U1.194 U1.198 U1.199 U1.200 U1.201 U1.202 U1.203 U1.204 U1.205 U1.206 U1.FID1 U1.FID2 U2.0 U2.1 U3.4 U4.4 U5.2 U5.9 U5.12 U5.13 U5.14 U5.15 U5.16 U6.1

## Keep-outs
Keep-Out Layer:
  circle w0.2: c5.25,5.25 r4
  circle w0.2: c174.75,5.275 r4
  circle w0.2: c5.25,45.25 r4
  circle w0.2: c174.75,45.25 r4

## Silkscreen, mask and mechanical layers (free items; w line width, h text height)
BOARD OUTLINE:
  lines w0.254: 0,50.505 ccw(c0,50.5) -0.005,50.5 -0.005,0 ccw(c0,0) 0,-0.005 180,-0.005 ccw(c180,0) 180.005,0 180.005,50.5 ccw(c180,50.5) 180,50.505 0,50.505 ; 0,50.505 0,50.505
TITLE BLOCK:
  drawing of 1882 lines, arcs and shapes, not listed
  text "1" at -27.169,163.093 h1.78
  text "2" at 21.869,163.093 h1.78
  text "3" at 71.129,163.093 h1.78
  text "4" at 120.421,163.093 h1.78
  text "5" at 169.697,163.093 h1.78
  text "6" at 218.719,163.093 h1.78
  text "7" at 268.249,163.093 h1.78
  text "8" at 317.271,163.093 h1.78
  text "A" at -49.301,129.108 h1.78
  text "A" at 339.319,129.108 h1.78
  text "B" at -49.301,58.496 h1.78
  text "B" at 339.319,58.496 h1.78
  text "C" at -49.301,-12.116 h1.78
  text "C" at 339.319,-12.116 h1.78
  text "D" at -49.301,-82.22 h1.78
  text "D" at 339.319,-82.22 h1.78
  text "ENGINEER:" at 224.384,-82.398 h1.14
  text "TITLE:" at 262.484,-82.398 h1.14
  text "C.CARLSON" at 232.334,-84.252 h1.5
  text "PCB Specialist Training" at 271.297,-85.602 h3
  text "PCB DESIGNER:" at 224.384,-89.891 h1.14
  text "Clearance Checking in 3D" at 271.297,-90.682 h3
  text "C.CARLSON" at 232.156,-92.888 h1.5
  text "DATE:" at 224.384,-97.638 h1.14
  text "PART NO.:" at 262.484,-97.638 h1.14
  text "REV:" at 315.824,-97.638 h1.14
  text "Altium Limited" at 191.364,-100.178 h1.78
  text "A" at 324.561,-100.584 h3
  text ".PRINT_DATE" at 225.654,-100.686 h1.78
  text "2175 Salk Avenue" at 191.364,-102.718 h1.78
  text "Suite 200" at 191.364,-105.258 h1.78
  text "FILE NAME:" at 224.384,-105.258 h1.14
  text "DWG NO:" at 262.484,-105.258 h1.14
  text "SCALE:" at 315.824,-105.258 h1.14
  text "NONE" at 323.367,-107.696 h1.52
  text "Carlsbad, CA 92008" at 191.364,-107.798 h1.78
  text ".PCB_FILE_NAME_NO_PATH" at 225.654,-108.306 h1.78
  text "1" at -27.169,-113.767 h1.78
  text "2" at 21.869,-113.767 h1.78
  text "3" at 71.129,-113.767 h1.78
  text "4" at 120.421,-113.767 h1.78
  text "5" at 169.697,-113.767 h1.78
  text "6" at 218.719,-113.767 h1.78
  text "7" at 268.249,-113.767 h1.78
  text "8" at 317.271,-113.767 h1.78

## Text inside footprints (layer, text, board x,y; h text height)
C1: Top Overlay "+" at 322.845,18.138 h1.5 r180
C2: Top Overlay "+" at 198.109,9.382 h1.5 r180
C3: Top Overlay "+" at 191.109,9.182 h1.5 r180
HDR1: Top Overlay "10" at 187.016,14.079 h1; Top Overlay "9" at 187.905,16.619 h1; Top Overlay "1" at 205.643,16.627 h1; Top Overlay "2" at 205.443,13.927 h1
HDR2: Top Overlay "20" at 316.869,29.926 h1 r90; Top Overlay "19" at 316.869,22.306 h1 r90; Top Overlay "1" at 294.009,23.449 h1 r90; Top Overlay "2" at 294.009,29.926 h1 r90; Top Overlay "16" at 311.789,29.926 h1 r90; Top Overlay "12" at 306.709,29.926 h1 r90; Top Overlay "6" at 299.089,29.926 h1 r90; Top Overlay "15" at 311.789,22.306 h1 r90; Top Overlay "11" at 306.709,22.687 h1 r90; Top Overlay "5" at 299.089,23.195 h1 r90; Top Overlay "18" at 314.329,29.926 h1 r90; Top Overlay "17" at 314.329,22.306 h1 r90; Top Overlay "14" at 309.249,29.926 h1 r90; Top Overlay "13" at 309.249,22.306 h1 r90; Top Overlay "10" at 304.169,29.926 h1 r90; Top Overlay "9" at 304.169,23.195 h1 r90; Top Overlay "8" at 301.629,29.926 h1 r90; Top Overlay "7" at 301.629,23.195 h1 r90; Top Overlay "4" at 296.549,29.926 h1 r90; Top Overlay "3" at 296.549,23.195 h1 r90
HDR3: Top Overlay "3" at 270.695,23.195 h1 r90; Top Overlay "4" at 270.695,29.926 h1 r90; Top Overlay "7" at 275.775,23.195 h1 r90; Top Overlay "8" at 275.775,29.926 h1 r90; Top Overlay "9" at 278.315,23.195 h1 r90; Top Overlay "10" at 278.315,29.926 h1 r90; Top Overlay "13" at 283.395,22.306 h1 r90; Top Overlay "14" at 283.395,29.926 h1 r90; Top Overlay "17" at 288.475,22.306 h1 r90; Top Overlay "18" at 288.475,29.926 h1 r90; Top Overlay "5" at 273.235,23.195 h1 r90; Top Overlay "11" at 280.855,22.687 h1 r90; Top Overlay "15" at 285.935,22.306 h1 r90; Top Overlay "6" at 273.235,29.926 h1 r90; Top Overlay "12" at 280.855,29.926 h1 r90; Top Overlay "16" at 285.935,29.926 h1 r90; Top Overlay "2" at 268.155,29.926 h1 r90; Top Overlay "1" at 268.155,23.449 h1 r90; Top Overlay "19" at 291.015,22.306 h1 r90; Top Overlay "20" at 291.015,29.926 h1 r90
Logo5: Top Overlay "5V DC" at 278.881,7.312 h1.2
U3: Top Overlay "1" at 202.242,23.247 h0.8 r90; Top Overlay "3" at 202.267,28.222 h0.8 r90; Top Overlay "2" at 202.229,25.661 h0.8 r90
U4: Top Overlay "2" at 221.008,25.661 h0.8 r90; Top Overlay "3" at 221.046,28.222 h0.8 r90; Top Overlay "1" at 221.021,23.247 h0.8 r90